# Altium PCB PCB1.PcbDoc
Units mil, origin at the board's own origin, x right, y up, seen from the top; angles counter-clockwise.
Board outline 1240.13 x 1035.43 mil, 4 copper layers (Top Layer, MidLayer1, MidLayer2, Bottom Layer); 68 components, 57 nets, 297 pads, 95 vias.
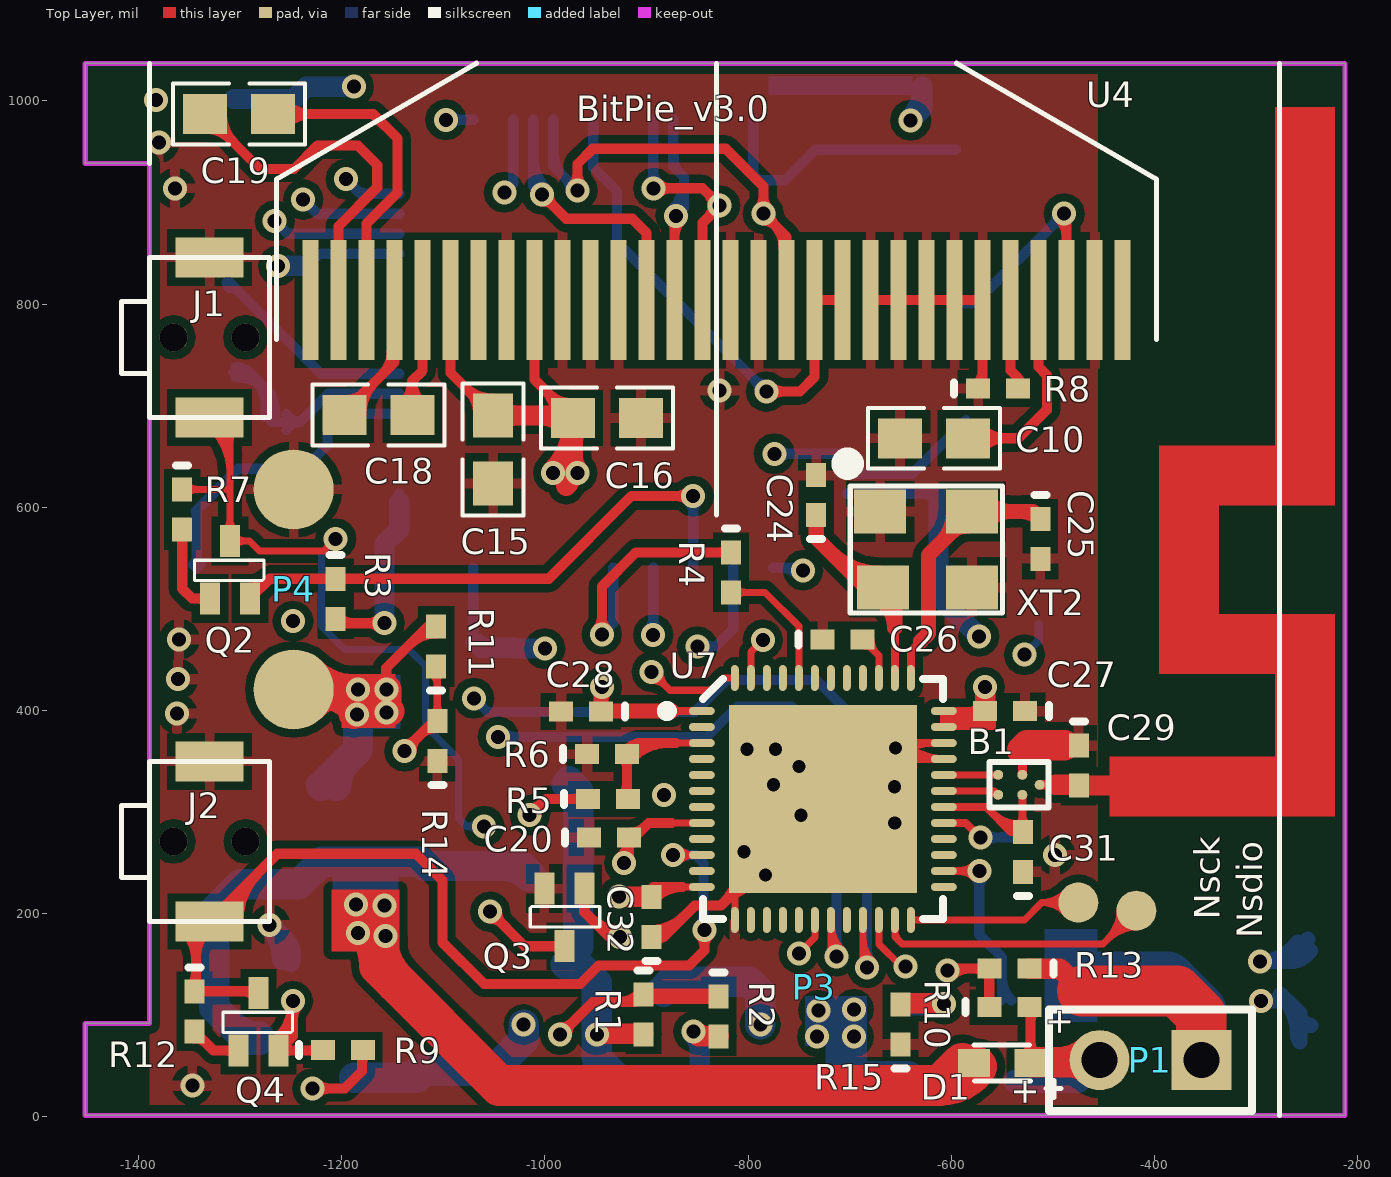
[diagram p0: Top Layer view]
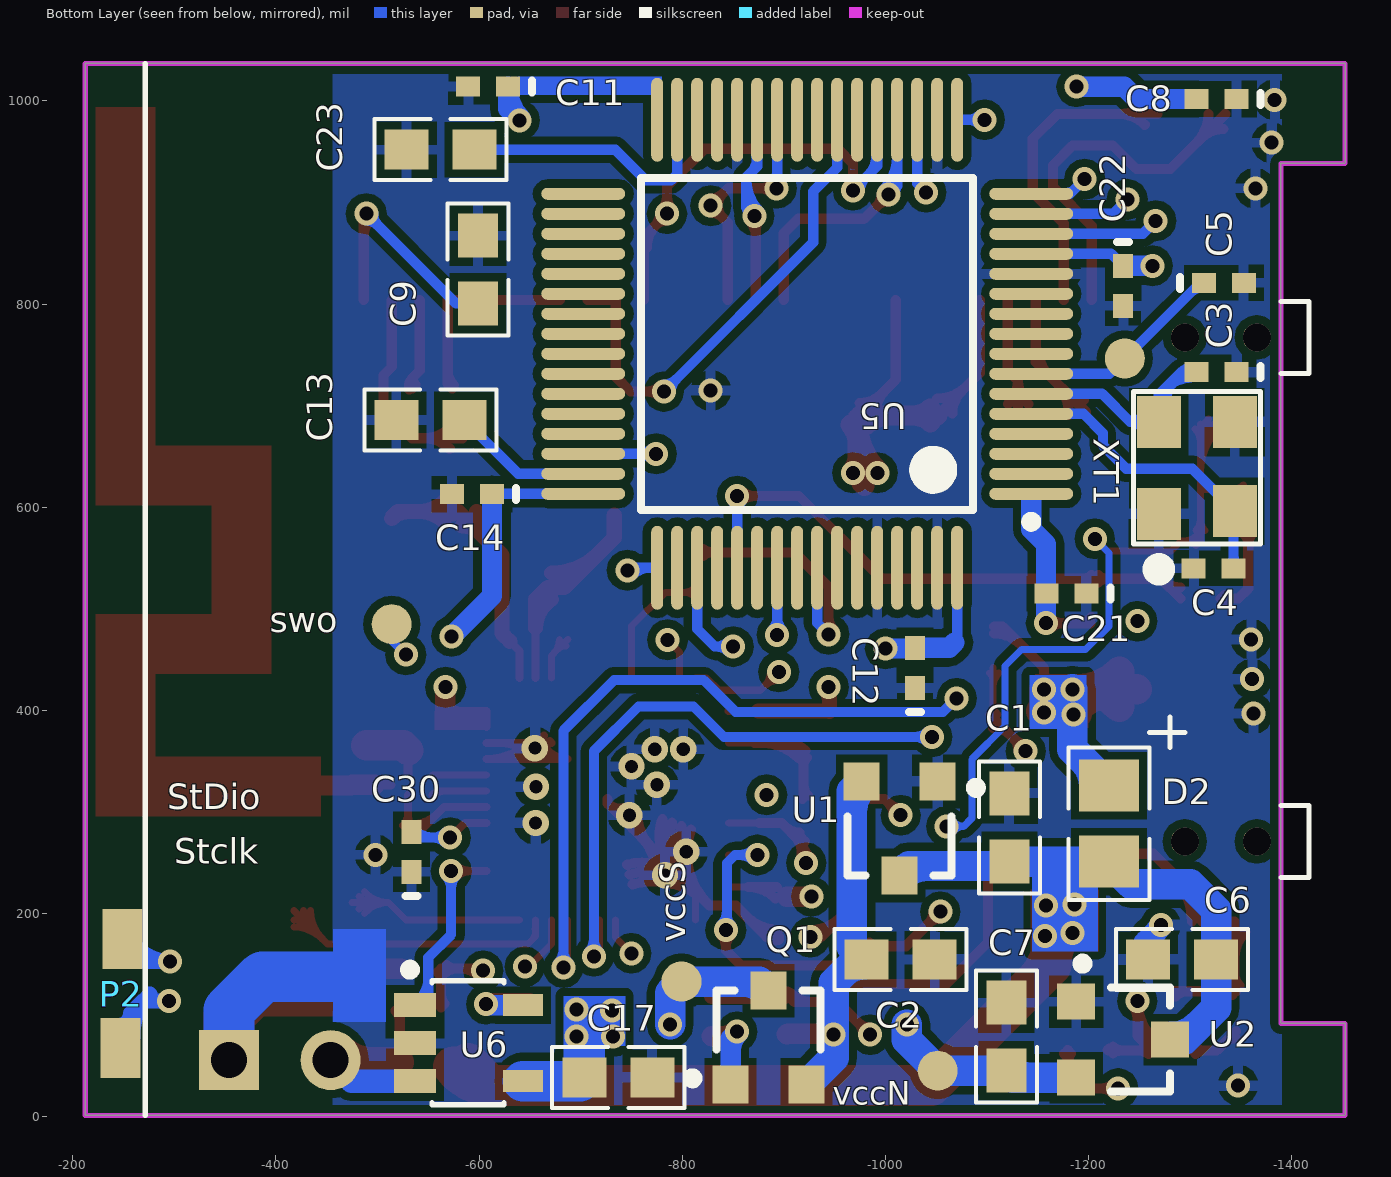
[diagram p1: Bottom Layer view, seen from below]
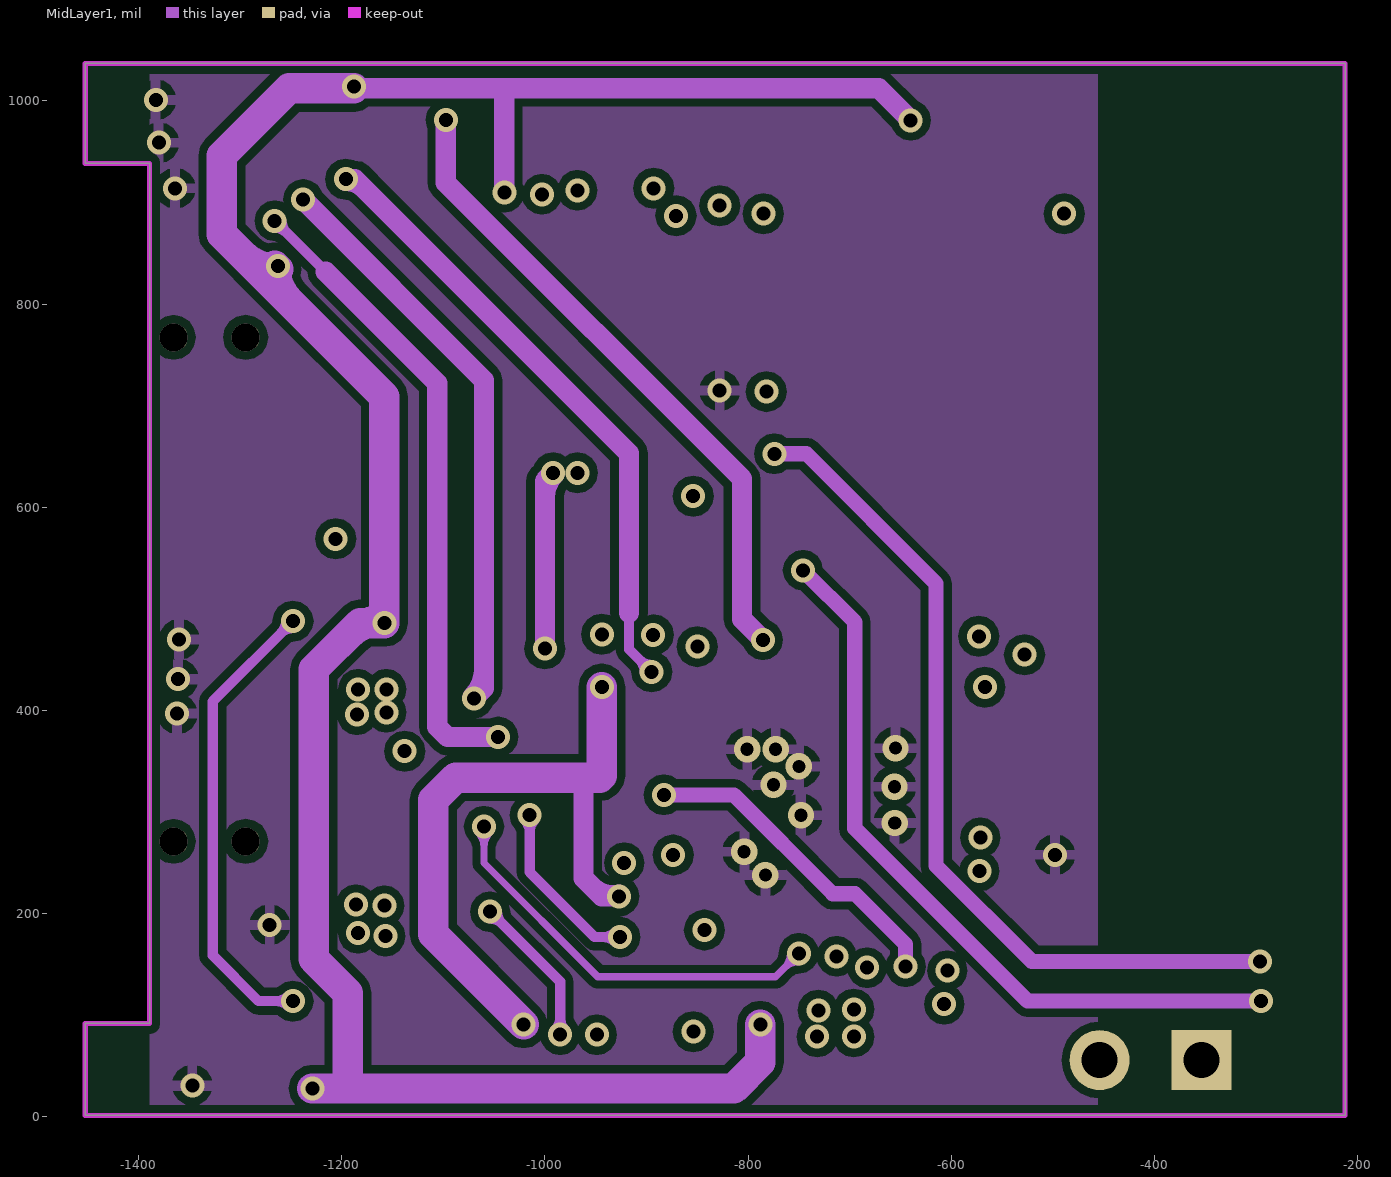
[diagram p2: MidLayer1]
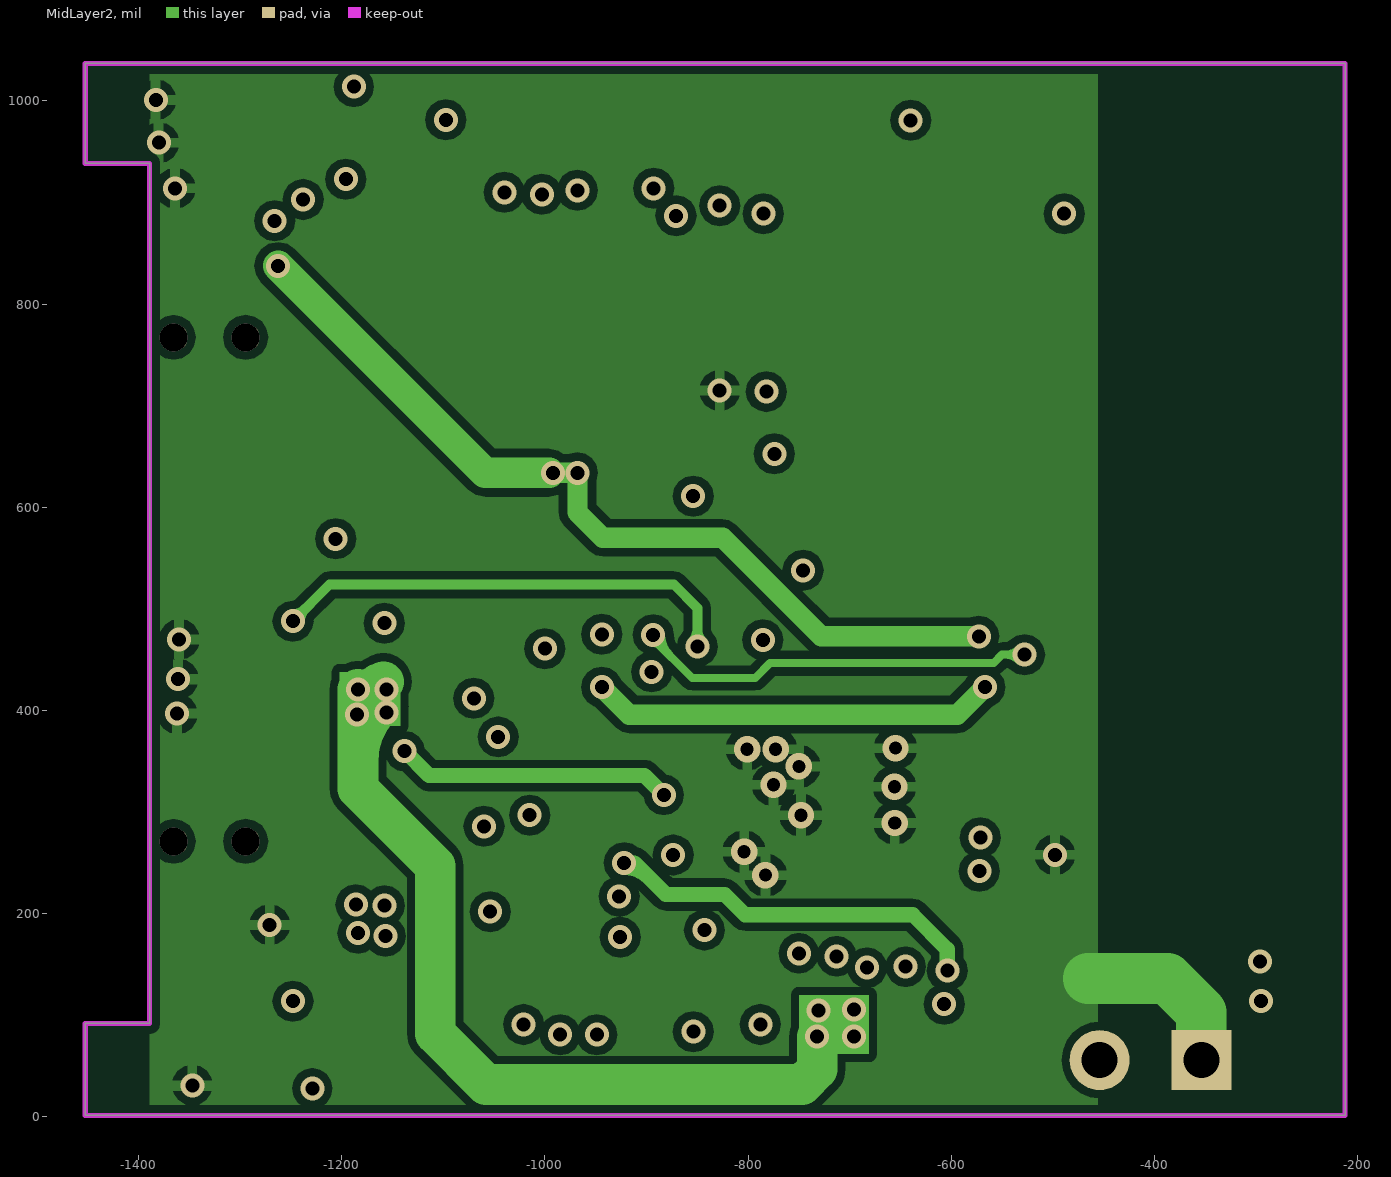
[diagram p3: MidLayer2]

## Layer stack, top to bottom
Top Layer: signal copper 1.4
Dielectric: core 12.6, FR-4, Dk 4.8
MidLayer1: signal copper 1.4
Dielectric: prepreg 12.6, FR-4, Dk 4.8
MidLayer2: signal copper 1.4
Dielectric: core 12.6, FR-4, Dk 4.8
Bottom Layer: signal copper 1.4

## Board outline
-1452.49,1036.95 -212.36,1036.95 -212.36,1.51 -1452.49,1.51 -1452.49,92.06 -1389.11,92.06 -1389.11,938.52 -1452.49,938.52 -1452.49,1036.95

## Design rules (kind name [scope] priority, off if disabled: settings)
Clearance [All] p1: gap=7
ComponentClearance [All] p1 off: gap=10 collisioncheckmode=3 verticalgap=10 showdistances=FALSE
Height [All] p1 off: minheight=0 maxheight=1000 prefheight=500
HoleSize [All] p1: absolutevalues=TRUE maxlimit=100 minlimit=0 maxpercent=80.000 minpercent=20.000
HoleToHoleClearance [All] p1 off: gap=10 allowstackedmicrovias=TRUE
LayerPairs [All] p1 off: enforce=TRUE
MinimumSolderMaskSliver [All] p1 off: minsoldermaskwidth=10
NetAntennae [All] p1 off: netantennaetolerance=0
PolygonConnect [All] p1: connectstyle=Relief reliefconductorwidth=10 reliefentries=4 polygonreliefangle="90 Angle"
RoutingVias [All] p1: holewidth=28 width=50 viastyle="Through Hole" minholewidth=1 minwidth=1 maxholewidth=280 maxwidth=500
SilkToSilkClearance [All] p1 off: silktosilkclearance=10
SilkscreenOverComponentPads [All] p1 off: minsilkscreentomaskgap=10
SolderMaskExpansion [All] p1: expansion=4
TestPointUsage [All] p1 off: valid=0 allowmultiple=FALSE
Testpoint [All] p1 off: side=15 testpointundercomponent=TRUE minsize=40 maxsize=100 preferedsize=60 minholesize=0 maxholesize=40 preferedholesize=32 testpointgrid=1 style=1023 order=0-112345678
Width [All] p1: maxlimit=100 minlimit=1 preferedwidth=10
15 further rules are at their usual default settings.

## Components (designator, comment, footprint, x,y, rotation, side; value= is the part's Value field where it differs from the comment)
B1 "BAL-NRF01D3" BAL-NRF01D3 -533.49,326.95 r0 top
C1 "1uF" 0603-1 -1122,285 r90 bottom
C2 "1uF" 0603-1 -1015,155 r180 bottom
C3 "22pF" 0402-A -1326,733 r0 bottom
C4 "22pF" 0402-a -1323,540 r180 bottom
C5 "1uF" 0402-a -1333,821 r180 bottom
C6 "1uF" 0603-1 -1292,155 r0 bottom
C7 "1uF" 0603-1 -1119,79 r90 bottom
C8 "0.1u" 0402-A -1326,1002 r0 bottom
C9 "2.2uF" 0603-1 -599,834 r90 bottom
C10 "4.7uF" 0603-1 -617,668 r180 top
C11 "0.1uf" 0402-A -609,1014 r0 bottom
C12 "0.1uf" 0402-A -1029,442 r90 bottom
C13 "2.2uF" 0603-1 -552,686 r0 bottom
C14 "0.1uf" 0402-A -593,613 r0 bottom
C15 "1uF" 0603-1 -1051,657 r270 top
C16 "1uF" 0603-1 -939,688 r0 top
C17 "4.7uF" 0603-1 -737,39 r0 bottom
C18 "1uF" 0603-1 -1164,691 r0 top
C19 "1uF" 0603-1 -1301,987 r0 top
C20 "2uf" 0402-A -937,275 r0 top
C21 "0.1uf" 0402-A -1178,515 r0 bottom
C22 "0.1uf" 0402-A -1234,818 r270 bottom
C23 "2.2uF" 0603-1 -562,952 r0 bottom
C24 "12Pf" 0402-a -733,612 r90 top
C25 "12Pf" 0402-a -512.49,568.95 r270 top
C26 "0.1uf" 0402-A -707,470 r0 top
C27 "1nf" 0402-a -547,399.56 r180 top
C28 "0.1uf" 0402-A -964.49,398.95 r180 top
C29 "0.8pf/NC" 0402-A -474.49,345.95 r270 top
C30 "47nf" 0402-A -533.49,260.95 r90 bottom
C31 "2.2nf" 0402-A -529.49,260.95 r90 top
C32 "0.1uf" 0402-A -895,197 r90 top
D1 "RB520S" sod523 -522,53 r180 top
D2 "4148" 0805-1 -1220,326 r270 bottom
J1 "ON/OFF" BUTTON -1330.06,846 r270 top
J2 "ON/OFF" BUTTON -1330.06,349.94 r270 top
P1 "Header 2" HDR1X2 -354,56 r180 top
P2 "DownLoad_stm32" swd6 -252,193 r270 bottom
P3 "DownLoad_Nodic" HDR1X4 -232,-506 r90 top
P4 "Header 2" PIN2_CHARGE -1247.34,617.65 r0 top
Q1 "1121" SOT-23 -885,78 r180 bottom
Q2 "3906" SOT523 -1310,563 r0 top
Q3 "3904" SOT523 -981,172 r180 top
Q4 "3906" SOT523 -1282,118 r0 top
R1 "1M" 0402-A -903,101 r270 top
R2 "1K" 0402-A -829,99 r270 top
R3 "1M" 0402-A -1206,510 r270 top
R4 "0R" 0402-A -817,536 r270 top
R5 "100K" 0402-A -938,313 r0 top
R6 "1M" 0402-A -939,357 r0 top
R7 "10K" 0402-A -1357,598 r270 top
R8 "390K" 0402-A -554,717 r0 top
R9 "1M" 0402-A -1199,66 r0 top
R10 "3M" 0402-A -543,108 r0 top
R11 "100K" 0402-A -1107,463 r90 top
R12 "10K" 0402-A -1345,104 r270 top
R13 "1M" 0402-A -543,146 r180 top
R14 "200K" 0402-A -1106,370 r90 top
R15 "20K" 0402-A -650,91 r90 top
U1 "MCP170" SOT-23 -1014,284 r0 bottom
U2 "170" SOT-23 -1234,76 r270 bottom
U4 "Oled12864" oled12864 -831.04,803.95 r0 top
U5 "stm32f205ret" LQFP-64 -923,761 r0 bottom
U6 "Tp4054" SOT-23_5-001 -537,110 r270 bottom
U7 "nRF51822-QFAA" QFN40P600X600X90-48N -726.49,312.95 r0 top
XT1 "8Mhz" SMD3225 -1269,684 r270 bottom
XT2 "16Mh" SMD3225 -579.49,595.95 r180 top

## Footprints (in the part's own frame and the unit in brackets; to place one, negate y for a bottom-side part, rotate by r counter-clockwise, add the part's x,y. Pads: shape width x height; smd on the part's side, far side on the other; paste and mask are expansions set on the pad)
0402-A [mm] "Chip Inductor; Body 1 x 0.5 mm (LxW typ)"
  rect 0.6x0.5 smd: 1(-0.5,0) 2(0.5,0)
  silkscreen extent -1.1,-0.15 -1.1,0.15
0402-a [mm] "Chip Inductor; Body 1 x 0.5 mm (LxW typ)"
  rect 0.6x0.5 smd: 1(-0.5,0) 2(0.5,0)
  silkscreen extent -1.1,-0.15 -1.1,0.15
0603-1 [mm] "贴片带丝印"
  rect 1.1x1 smd: 1(-0.85,0) 2(0.85,0)
  silkscreen extent -1.65,-0.76 1.65,0.76, body extent -1.14,-0.38 1.14,0.38, height 1
0805-1 [mm]
  rect 1.3x1.5 smd: 1(0,0) 2(1.9,0)
  silkscreen extent -1.72,-1.02 2.85,1.91
BAL-NRF01D3 [mm] "ST BAL-NRF01D3"
  round 0.25 smd: 1(-0.519,-0.25) 2(-0.519,0.25) 3(0.085,-0.25) 4(0.085,0.25) 5(0.518,0)
  silkscreen extent -0.74,-0.57 0.74,0.57
BUTTON [mm]
  rect 1x1.7 smd: 1(0,0) 2(4,0)
  round 0.7 hole 0.7: 3(2,-0.9) 3(2,0.9)
  silkscreen extent 0,-1.5 4,1.5
HDR1X2 [mm] "Connector; Header; 2 Position"
  rect 1.5x1.5 hole 0.9: 1(0,0)
  round 1.5 hole 0.9: 2(2.54,0)
  silkscreen extent -1.27,-1.27 3.81,1.27
HDR1X4 [mm] "Connector; Header; 4 Position"
  round 1 smd far side: 2(14.009,20.814)
  round 1 smd: 3(18.009,4.724) 4(18.212,6.172)
LQFP-64 [mm] "LQFP64"
  oval 2.1x0.3 smd: 1(-5.6,3.75) 2(-5.6,3.25) 3(-5.6,2.75) 4(-5.6,2.25) 5(-5.6,1.75) 6(-5.6,1.25) 7(-5.6,0.75) 8(-5.6,0.25) 9(-5.6,-0.25) 10(-5.6,-0.75) 11(-5.6,-1.25) 12(-5.6,-1.75) 13(-5.6,-2.25) 14(-5.6,-2.75) 15(-5.6,-3.25) 16(-5.6,-3.75) 33(5.6,-3.75) 34(5.6,-3.25) 35(5.6,-2.75) 36(5.6,-2.25) 37(5.6,-1.75) 38(5.6,-1.25) 39(5.6,-0.75) 40(5.6,-0.25) 41(5.6,0.25) 42(5.6,0.75) 43(5.6,1.25) 44(5.6,1.75) 45(5.6,2.25) 46(5.6,2.75) 47(5.6,3.25) 48(5.6,3.75)
  oval 0.3x2.1 smd: 17(-3.75,-5.6) 18(-3.25,-5.6) 19(-2.75,-5.6) 20(-2.25,-5.6) 21(-1.75,-5.6) 22(-1.25,-5.6) 23(-0.75,-5.6) 24(-0.25,-5.6) 25(0.25,-5.6) 26(0.75,-5.6) 27(1.25,-5.6) 28(1.75,-5.6) 29(2.25,-5.6) 30(2.75,-5.6) 31(3.25,-5.6) 32(3.75,-5.6) 49(3.75,5.6) 50(3.25,5.6) 51(2.75,5.6) 52(2.25,5.6) 53(1.75,5.6) 54(1.25,5.6) 55(0.75,5.6) 56(0.25,5.6) 57(-0.25,5.6) 58(-0.75,5.6) 59(-1.25,5.6) 60(-1.75,5.6) 61(-2.25,5.6) 62(-2.75,5.6) 63(-3.25,5.6) 64(-3.75,5.6)
  silkscreen extent -5.72,-4.15 4.15,4.57, body extent -5,-5 5,5, height 1.6
oled12864 [mm]
  rect 0.4x3 smd: 1(-10.15,0) 2(-9.45,0) 3(-8.75,0) 4(-8.05,0) 5(-7.35,0) 6(-6.65,0) 7(-5.95,0) 8(-5.25,0) 9(-4.55,0) 10(-3.85,0) 11(-3.15,0) 12(-2.45,0) 13(-1.75,0) 14(-1.05,0) 15(-0.35,0) 16(0.35,0) 17(1.05,0) 18(1.75,0) 19(2.45,0) 20(3.15,0) 21(3.85,0) 22(4.55,0) 23(5.25,0) 24(5.95,0) 25(6.65,0) 26(7.35,0) 27(8.05,0) 28(8.75,0) 29(9.45,0) 30(10.15,0)
  silkscreen extent -11,-0.98 11,5.92
PIN2_CHARGE [mm]
  round 2 smd: 1(0,0) 2(0,-5)
QFN40P600X600X90-48N [mm] "QFN, 48-Leads, Body 6,0x6,0mm (max), Pitch 0,40mm, IPC Medium Density"
  oval 0.65x0.2 smd: 1(-3.025,2.2) 2(-3.025,1.8) 3(-3.025,1.4) 4(-3.025,1) 5(-3.025,0.6) 6(-3.025,0.2) 7(-3.025,-0.2) 8(-3.025,-0.6) 9(-3.025,-1) 10(-3.025,-1.4) 11(-3.025,-1.8) 12(-3.025,-2.2) 25(3.025,-2.2) 26(3.025,-1.8) 27(3.025,-1.4) 28(3.025,-1) 29(3.025,-0.6) 30(3.025,-0.2) 31(3.025,0.2) 32(3.025,0.6) 33(3.025,1) 34(3.025,1.4) 35(3.025,1.8) 36(3.025,2.2)
  oval 0.2x0.65 smd: 13(-2.2,-3.025) 14(-1.8,-3.025) 15(-1.4,-3.025) 16(-1,-3.025) 17(-0.6,-3.025) 18(-0.2,-3.025) 19(0.2,-3.025) 20(0.6,-3.025) 21(1,-3.025) 22(1.4,-3.025) 23(1.8,-3.025) 24(2.2,-3.025) 37(2.2,3.025) 38(1.8,3.025) 39(1.4,3.025) 40(1,3.025) 41(0.6,3.025) 42(0.2,3.025) 43(-0.2,3.025) 44(-0.6,3.025) 45(-1,3.025) 46(-1.4,3.025) 47(-1.8,3.025) 48(-2.2,3.025)
  rect 4.7x4.7 smd: 49(0,0)
  silkscreen extent -4.02,-3 3,3, body extent -3,-3 3,3, height 0.9
SMD3225 [mm]
  rect 1.3x1.1 smd: 1(0,0) 2(2.3,0) 3(2.23,1.9) 4(0,1.9)
  silkscreen extent -0.76,-0.64 3.81,2.54
sod523 [mm]
  rect 0.8x0.7 smd: 1(0,0) 2(1.42,0)
  silkscreen extent -0.76,-0.45 1.42,0.86
SOT523 [mm]
  rect 0.5x0.8 smd: 1(-0.5,-1.34) 2(0.5,-1.34) 3(0,0.1)
  silkscreen extent -0.89,-0.89 0.85,-0.38
SOT-23 [mm]
  rect 0.9x0.95 smd: 1(-0.95,-1.175) 2(0.95,-1.175) 3(0,1.175)
  silkscreen extent -2.03,-1.14 1.3,1.18
SOT-23_5-001 [mm]
  rect 0.6x1.05 smd: 1(0,0) 2(0.95,0) 3(1.9,0)
  rect 0.55x1 smd: 4(1.9,2.7) 5(0,2.7)
  silkscreen extent -1.01,-0.25 2.49,2.22, body extent -0.49,0 2.41,2.8, height 1.09
swd6 [mm]
  rect 1.5x1 smd: 2(0.457,-0.076) 3(3.175,-0.127)

## Part data
B1: "ST BAL-NRF01D3"
C1 C2 C3 C4 C5 C6 C7 C9 C10 C13 C15 C16 C17 C18 C19 C23: library part CAP-0.1UF, "SMD-CAP"
C8 C11 C12 C14 C21 C22: "Capacitor, X7R, ?0%"
C20 C26 C28 C32: library part C0402-100n, "Capacitor, X7R, ?0%"
C24 C25: library part C0402-12p, "Capacitor, NP0, ?%"
C27: library part C0402-1n0, "Capacitor, X7R, ?0%"
C29: library part C0402-0.8p, "Capacitor, NP0, ?%"
C30: library part C0402-47n, "Capacitor, X7R, ?0%"
C31: library part C0402-2n2, "Capacitor, X7R, ?0%"
D1: library part Diode, "Default Diode"
D2: library part "Diode 1N4148", "High Conductance Fast Diode"
J1 J2: library part KEY
P1 P4: "Header, 2-Pin"
P2: library part "Header 6", "Header, 6-Pin"
P3: library part "Header 4", "Header, 4-Pin"
Q1: library part MOSFET-P, "P-Channel MOSFET"
Q2 Q4: library part 2N3906, "PNP General Purpose Amplifier"
Q3: library part 2N3904, "NPN General Purpose Amplifier"
R1 R2 R3 R4 R5 R6 R7 R8 R9 R10 R11 R12 R13 R14 R15: library part R-10K, "resistor"
U2: library part MCP170
U7: library part nRF51822-Q48-6x6_DCDC, "Multi-protocol Bluetooth Low Energy and 2.4GHz proprietary system-on-chip"
XT1 XT2: library part XT, "晶振"

## Free pads (board coordinates)
  round 39.37 smd far side: 2(-799.26,133.26) 4(-1235.55,746.55) 6(-514,485)

## Via types
v1: diameter 23.62, hole 13.78, Top Layer to Bottom Layer, 85 vias
v2: diameter 25.98, hole 12.99, Top Layer to Bottom Layer, 10 vias

## Nets (pads, with @x,y where several pads share a name; then routed paths per layer and width w, separated by ;. In a path a pad name is that pad's centre, name@x,y a point inside that pad or via, vN(x,y) a via of type N, cw(c..) or ccw(c..) an arc to the next point about the centre after c; other vN are vias at no path point)
ADC_VBAT: C20.2 R10.1 R13.2 U7.8 | length 715
  Top Layer w7: -875.68,289.32 U7.8
  Top Layer w10: v1@-926.43,255.17 ccw(c-943.43,275) C20.2 -917.31,252.69 -920,250 v1(-922,250) ; C20.2@-920.74,271.58 cw(c-929.01,263.31) -917.31,263.31 cw(c-905.62,263.31) C20.2@-913.89,271.58 ; C20.2@-915.35,279.84 ccw(c-915.35,298.85) -901.9,285.41 ; C20.2@-914.81,272.5 -897.99,289.32 -875.68,289.32 ; v1(-604,144) -602,146 R13.2 R10.1 ; v1@-599.18,139.18 cw(c-582.73,122.73) -582.73,146 ; R13.2@-568.08,142.58 ccw(c-576.34,134.31) -576.34,146 ccw(c-576.34,157.69) R13.2@-568.08,149.42 ; R10.1@-566.11,111.42 ccw(c-574.38,119.69) -562.68,119.69 ccw(c-550.99,119.69) R10.1@-559.26,111.42 ; R13.2@-566.11,142.58 cw(c-574.38,134.31) -562.68,134.31 cw(c-550.99,134.31) R13.2@-559.26,142.58
  MidLayer2 w15: v1@-922,245.69 cw(c-922,211.14) -897.57,235.57 ; v1(-922,250) -912,250 -881,219 -823,219 -803,199 -638,199 -604,165 v1(-604,144)
CHARGESTAUTS: U6.1 U7.26 | length 250.5
  Top Layer w8: U7.26 v1@-572.62,242.08 ; -591.67,242.08 cw(c-591.67,222.76) v1@-578.01,236.42 ; -591.02,242.08 ccw(c-591.02,260.48) v1@-578.01,247.47
  Bottom Layer w10: v1@-577.31,237.13 cw(c-588.93,225.5) -572.49,225.5 cw(c-556.05,225.5) v1@-567.67,237.13 ; v1(-572.49,241.95) -572.49,179.49 -550,157 U6.1@-550,115 ; -550,136.44 ccw(c-519.42,136.44) U6.1@-541.04,114.82
CTS: U5.14 U7.19 | length 1489.9
  Top Layer w7: -718.62,174.72 ccw(c-696.28,174.72) v1@-712.07,158.93 ; U7.19@-718.62,191.62 ccw(c-679.38,191.62) v1@-707.12,163.88 ; U7.19 -718.62,163.62 v1(-713,158)
  MidLayer1 w10: v1@-1266,875.19 cw(c-1266,858.75) -1254.37,870.37 cw(c-1242.75,882) v1@-1259.19,882 ; v1(-1266,882) -1215.79,831.79
  MidLayer1 w20: -1215.79,831.79 -1106,722 -1106,384 -1096,374 v1(-1046,374)
  Bottom Layer w10: v1(-1266,882) -1253.27,869.27 U5.14 ; v1@-1046,378.01 v1(-1046,374) -841,374 -811,404 -757,404 -713,360 v1(-713,158) ; v1@-1041.18,369.18 cw(c-1029.56,357.56) -1029.56,374 cw(c-1029.56,390.44) v1@-1041.18,378.82 ; v1@-717.82,162.82 ccw(c-729.44,174.44) -713,174.44 ccw(c-696.56,174.44) v1@-708.18,162.82
CTS_NODIC: U5.15 U7.21 | length 1467.7
  Top Layer w7: v1@-687.12,151.12 U7.21 ; -687.12,160.11 ccw(c-669.89,160.11) v1@-682.07,147.93 ; -687.12,177.01 ccw(c-652.99,177.01) v1@-677.12,152.88
  MidLayer1 w20: v1(-1238,903) -1060,725 -1060,422 v1(-1070,412) ; v1@-1071.28,413.28 ccw(c-1098.51,440.51) -1060,440.51
  Bottom Layer w10: v1(-1238,903) -1223.95,888.95 U5.15 ; v1(-1070,412) -1056.5,398.5 -852.5,398.5 -821,430 -733,430 -683,380 v1(-683,147) ; v1@-687.82,151.82 ccw(c-699.44,163.44) -683,163.44 ccw(c-666.56,163.44) v1@-678.18,151.82
GND: B1.4 C1.2 C2.2 C3.1 C4.1 C5.2 C6.2 C7.2 C8.1 C9.2 C10.2 C11.2 C12.1 C13.2 C14.2 C15.2 C16.2 C17.1 C20.1 C21.1 C22.2 C23.2 C24.2 C25.2 C26.1 C27.1 C28.2 C29.1 C30.1 C31.1 C32.1 J1.1 J2.1 P1.1 P4.1 Q3.2 R6.1 R8.1 R13.1 R14.1 R15.1 U1.1 U2.1 U4.8 U4.10 U4.11 U4.12 U4.16 U4.17 U4.21 U4.22 U4.23 U4.24 U4.25 U4.29 U5.12 U5.18 U5.28 U5.60 U5.63 U6.2 U7.13 U7.33 U7.34 U7.49 XT1.2 XT1.4 XT2.2 XT2.4 | length 2433.6
  Top Layer w7: U7.13 U7.49@-813.1,226.33
  Top Layer w8: U7.49@-674.06,352.32 ccw(c-674.06,372.72) U7.49@-655.88,363.45 ; U7.49@-671.37,368.06 U7.34 ; U7.49@-669.55,369.88 ccw(c-627.15,412.29) -627.15,352.32 ; U7.49@-665.61,352.39 ccw(c-665.44,352.56) U7.49@-665.44,352.32 ; U7.49@-663.01,367.08 cw(c-687.12,379.37) -687.12,352.32 U7.33 ; U7.49@-659.96,358.04 ccw(c-646.12,371.88) U7.49@-646.12,352.32 ; U7.49@-654.3,362.3 cw(c-640.38,348.38) U7.49@-640.38,368.06 ; U7.49@-654.3,363.7 ccw(c-626.81,391.19) -626.81,352.32 ; U7.49@-648.64,356.64 cw(c-621.07,329.07) -621.07,368.06 ; U7.49@-648.64,369.36 ccw(c-607.5,410.5) U7.33@-607.5,352.32 ; U7.49@-645.85,368.06 cw(c-645.85,393.58) -663.9,375.54 ccw(c-607.83,431.6) U7.33@-607.83,352.32
  Top Layer w9: B1.4 -530.13,360.87
  Top Layer w10: C32.1@-895,174.13 ccw(c-895,194.53) -880.57,180.1 ; C32.1 -882.68,177.32 -882.68,177.99 -852.67,208 -827,208 U7.49@-726.49,308.51 ; C32.1@-895,184.13 ccw(c-895,228.67) -863.5,197.17 ; C32.1@-891.58,173.89 cw(c-883.31,165.62) -883.31,177.32 cw(c-883.31,189.01) C32.1@-891.58,180.74 ; -820.54,214.46 cw(c-783,176.91) U7.49@-783,230.01 ; U7.49@-813.69,221.31 ccw(c-857.5,265.11) U7.49@-799.31,286.36 ; U7.49@-812.87,222.13 cw(c-766.77,176.03) U7.49@-748.37,238.58 ; U7.49@-808.7,282.93 cw(c-873.74,259.18) -824.78,210.22 cw(c-772.18,157.62) U7.49@-751.19,228.98 ; U7.49@-803.47,231.53 cw(c-783,211.06) U7.49@-783,240.01 ; U7.49@-802.61,232.39 ccw(c-841.25,271.04) U7.49@-789.91,289.79 ; U7.49@-800.96,234.04 cw(c-761.35,194.44) U7.49@-745.55,248.17 ; U7.49@-791.52,243.48 ccw(c-825.01,276.97) U7.49@-780.52,293.22 ; U7.49@-785.01,238 cw(c-756.06,238) U7.49@-776.53,258.47 ; U7.49@-775.01,238 cw(c-721.91,238) U7.49@-759.46,275.54 ; U7.49@-768.71,266.29 ccw(c-799.43,297) U7.49@-755.99,297 ; U7.49@-751.64,283.36 ccw(c-765.29,297) U7.49@-745.99,297 ; U7.49@-745.18,304.48 ccw(c-738.96,320.98) U7.49@-726.49,308.51 ; U7.49 U7.49@-726.49,308.51 ; U4.21 U4.22 U4.23 U4.24 U4.25 -569.23,721.46 R8.1 ; R8.1@-575.14,720.42 ccw(c-589.41,734.7) -569.23,734.7
  Top Layer w20: R13.1 -493,146 -471,124
  Top Layer w30: -530.13,360.87 -525.37,365.63 -489,365.63
  Top Layer w50: -471,124 -378,124 -354,100 P1.1
  MidLayer2 w50: -465.27,136.27 -387.27,136.27 -354,103 P1.1
  Bottom Layer w20: v1@-1272.28,187.72 cw(c-1305.46,154.54) C6.2@-1258.54,154.54 ; v1(-1271,189) -1258.54,176.54 C6.2 ; -1256.9,174.9 cw(c-1273.87,157.93) C6.2@-1250.43,152.79
  Bottom Layer w50: -473,138 -387,138 -354,105 P1.1
  other v1: -1347,31 -498,258 -1362,397 -1361,431 -1360,470 -828,715 -1364,914 -1380,959 -1383,1001
  other v2: -783,238 -804,261 -655.62,289.32 -748,297 -656,325 -775,327 -750,345 -801,362 -773,362 -655,363
KEY1: Q2.2 R3.1 U5.53 | length 657.3
  Top Layer w10: Q2.2 -1270.87,529.68 R3.1 -996.31,529.68 -914.9,611.1 v1(-854.1,611.1) ; Q2.2@-1290.31,520.99 ccw(c-1290.31,546.94) -1271.97,528.59 ; R3.1@-1209.42,526.26 ccw(c-1217.69,517.99) -1217.69,529.68 ccw(c-1217.69,541.38) R3.1@-1209.42,533.11 ; R3.1@-1202.58,526.26 cw(c-1194.31,517.99) -1194.31,529.68 cw(c-1194.31,541.38) R3.1@-1202.58,533.11 ; v1@-858.92,606.29 ccw(c-870.55,594.66) -870.55,611.1 ccw(c-870.55,627.55) v1@-858.92,615.92
  Bottom Layer w10: v1@-858.92,606.29 cw(c-870.55,594.66) -854.1,594.66 cw(c-837.66,594.66) v1@-849.29,606.29 ; U5.53 v1(-854.1,611.1)
KEY1_NODIC: J1.2 Q2.3 R7.1 U7.18 | length 1392.9
  Top Layer w7: R7.1 -1311.31,617.68 ; R7.1@-1352.52,613.2 cw(c-1341.69,602.37) -1341.69,617.69 cw(c-1341.69,633) R7.1@-1352.52,622.17 ; J1.2@-1327.72,677.08 cw(c-1370.5,634.3) -1310,634.3 ; J1.2@-1322.77,682.02 cw(c-1353.6,651.19) -1310,651.19 ; J1.2@-1317.82,686.97 cw(c-1336.7,668.09) -1310,668.09 ; Q2.3@-1314.48,577.33 ccw(c-1325.31,588.15) -1310,588.15 ccw(c-1294.69,588.15) Q2.3@-1305.52,577.33 ; -1310,664.6 cw(c-1292.35,664.6) J1.2@-1304.83,677.08 ; J1.2@-1310,682 Q2.3 -1290.94,566.94 -1281,557 -1218,557 v1(-1206,569) ; Q2.3@-1305.52,562.45 cw(c-1294.69,551.62) -1294.69,566.94 cw(c-1294.69,582.25) Q2.3@-1305.52,571.42 ; v1(-750,161) -734.36,176.64 U7.18
  MidLayer1 w7: v1@-1065.88,280.12 cw(c-1080.06,265.94) -1060,265.94 cw(c-1039.94,265.94) v1@-1054.12,280.12 ; v1(-1060,286) -1060,250 -948,138 -773,138 v1(-750,161) ; v1@-758.31,161 cw(c-778.38,161) -764.19,146.81 cw(c-750,132.62) v1@-750,152.69
  Bottom Layer w7: v1(-1206,569) -1220,555 -1220,483 -1197,460 -1134,460 -1117.73,443.73 -1117.73,384.73 -1085,352 -1085,294 -1077,286 ; v1@-1066.56,280.9 ccw(c-1077,272.77) -1077,286 ; v1@-1066.56,291.1 cw(c-1077,299.23) -1077,286 ; v1(-1060,286) -1077,286
KEY2: Q4.2 R9.1 U5.51 | length 1400.7
  Top Layer w10: Q4.2@-1265.54,74.76 ccw(c-1300.65,114) v1(-1248,114) -1248,79.56 ; Q4.2@-1261.18,75.86 ccw(c-1257.89,89.44) -1248,79.56 ; Q4.2@-1258.89,61.82 cw(c-1250.62,53.55) -1250.62,65.24 cw(c-1250.62,76.93) Q4.2@-1258.89,68.67 ; Q4.2@-1258.88,67.31 ccw(c-1280.64,91.63) -1248,91.63 ; v1@-1252.82,109.18 cw(c-1264.44,97.56) -1248,97.56 cw(c-1231.56,97.56) v1@-1243.18,109.18 ; -1234.17,65.24 ccw(c-1234.17,79.52) R9.1@-1224.08,69.42 ; -1230.52,65.24 cw(c-1230.52,56.13) R9.1@-1224.08,62.58 ; R9.1@-1220,67.32 R9.1 -1219.44,65.24 Q4.2 -1260.16,67.4 -1248,79.56
  MidLayer1 w10: v1@-1254.81,488 cw(c-1271.25,488) -1259.63,476.37 cw(c-1248,464.75) v1@-1248,481.19 ; v1@-1252.82,109.18 ccw(c-1264.44,97.56) -1264.44,114 ccw(c-1264.44,130.44) v1@-1252.82,118.82 ; v1(-1248,114) -1282,114 -1327,159 -1327,409 v1(-1248,488)
  MidLayer2 w10: v1(-1248,488) -1212,524 -873,524 -850,501 v1(-850,463) ; v1@-1248,494.81 ccw(c-1248,511.25) -1236.37,499.63 ccw(c-1224.75,488) v1@-1241.19,488 ; v1@-854.82,467.82 ccw(c-866.44,479.44) -850,479.44 ccw(c-833.56,479.44) v1@-845.18,467.82
  Bottom Layer w10: v1(-850,463) -832,463 -814.73,480.27 U5.51 ; v1@-845.18,458.18 cw(c-833.56,446.56) -833.56,463 cw(c-833.56,479.44) v1@-845.18,467.82
KEY2_NODIC: J2.2 Q4.3 R12.1 U7.10 | length 1206.9
  Top Layer w7: v1(-873.83,257.83) U7.10 ; v1@-867.95,251.95 cw(c-853.76,237.76) -853.76,257.83 cw(c-853.76,277.89) v1@-867.95,263.7
  Top Layer w10: J2.2@-1354.22,182.07 cw(c-1380.2,156.09) -1343.46,156.09 ; R12.1@-1348.42,129.08 ccw(c-1360.42,141.07) -1343.46,141.07 ; R12.1 -1283.75,123.68 Q4.3 ; R12.1@-1343.46,125.23 -1343.46,192.46 J2.2 -1263.51,259 -1127,259 -1101,233 -1101,172 -1060,131 -965,131 -947,149 -858,149 -843,164 v1(-843,184) ; -1343.46,157.92 cw(c-1309.29,157.92) J2.2@-1333.45,182.07 ; R12.1@-1341.58,120.26 cw(c-1333.31,111.99) -1333.31,123.68 cw(c-1333.31,135.38) R12.1@-1341.58,127.11 ; J2.2@-1311.59,192.46 cw(c-1267.01,192.46) -1298.53,223.98 ; J2.2@-1301.59,192.46 cw(c-1232.87,192.46) -1281.46,241.05 ; -1297.91,123.68 cw(c-1297.91,106.03) Q4.3@-1285.42,118.51 ; v1@-847.82,179.18 cw(c-859.44,167.56) -843,167.56 cw(c-826.56,167.56) v1@-838.18,179.18
  Bottom Layer w10: v1(-873.83,257.83) -851.83,257.83 -844,250 v1@-844,185 ; v1@-869.01,253.01 cw(c-857.38,241.38) -857.38,257.83 cw(c-857.38,274.27) v1@-869.01,262.64 ; v1@-847.82,188.82 ccw(c-857.03,198.03) -844,198.03 ; -844,202.86 ccw(c-824.14,202.86) v1@-838.18,188.82
NetB1_1: B1.1 U7.31 | length 67.7
  Top Layer w7: U7.31 -557.62,320.82 B1.1 ; -566.31,320.82 cw(c-566.31,304.7) B1.1@-554.91,316.1
NetB1_2: B1.2 U7.32 | length 53.3
  Top Layer w7: U7.32 B1.2@-554.13,336.57
NetB1_3: B1.3 C31.2 U7.30 | length 213.2
  Top Layer w8: U7.30 -565.62,305.07 -541.17,280.63 ; -558.79,298.24 ccw(c-534.4,322.63) C31.2@-530.2,288.4 ; -547.19,286.64 ccw(c-531.86,301.97) C31.2@-529.23,280.46 ; C31.2@-534.16,277.12 ccw(c-541.17,271.87) -541.17,280.63 ; C31.2@-534.16,284.14 cw(c-541.17,289.39) -541.17,280.63 ; C31.2@-533.62,286.73 ccw(c-542.05,295.16) -530.13,295.16 ; C31.2@-530.13,281.27 B1.3 ; -530.13,298.24 ccw(c-513.84,298.24) C31.2@-525.36,286.73 ; C31.2 -541.17,280.63
NetB1_5: B1.5 C29.2 | length 96.6
  Top Layer w9: B1.5 -497.49,326.95
  Top Layer w20: -497.49,326.95 -475.17,326.95 C29.2 -416.8,326.26
NetC1_1: C1.1 C6.1 D1.2 D2.2 U1.3 U2.3 | length 1435.6
  Top Layer w30: D1.2@-589,53 D1.2
  Top Layer w40: v1@-1180.19,188.25 cw(c-1195.16,159.79) -1163,159.79 ; v1@-1178.21,186.79 cw(c-1214.93,150.07) -1163,150.07 ; v1@-1165.19,178 ccw(c-1100.46,178) -1146.23,132.23 ; v1@-1163,178 -1163,149 -1045.01,31.01 -610.99,31.01 ; -617.94,31.01 ccw(c-617.94,91.07) D1.2@-575.48,48.6 ; D1.2@-589,53 -610.99,31.01 ; D1.2@-574.86,49.32 cw(c-610.99,75.81) -610.99,31.01
  Bottom Layer w30: -1307.66,89.66 ccw(c-1281.24,116.07) U2.3@-1281.24,78.72 ; U2.3 -1294,76 -1325.46,107.46 -1325.46,203.54 -1300,229 -1242.2,229 D2.2 -1122.34,251.2 -1118.14,247 -1023.26,247 U1.3 ; -1040.54,247 cw(c-1040.54,212.19) U1.3@-1015.92,236.8
  other v1: -1157,178 -1184,181 -1158,208 -1186,209
NetC9_1: C9.1 U4.28 | length 278
  Top Layer w10: v1@-493.82,884.18 cw(c-511.36,866.64) -486.55,866.64 ; v1(-489,889) -486.55,886.55 U4.28
  Bottom Layer w10: C9.1 -577.46,800.54 v1(-489,889) ; v1@-495.81,889 cw(c-512.25,889) -500.63,877.37 cw(c-489,865.75) v1@-489,882.19
NetC10_1: C10.1 U4.27 | length 256.1
  Top Layer w10: C10.1 -534,668 -506,696 -506,730 -514.11,738.11 U4.27 ; C10.1@-571.18,657.62 cw(c-546.11,632.55) -546.11,668 cw(c-546.11,703.45) C10.1@-571.18,678.38
NetC13_1: C13.1 U5.47 | length 139
  Bottom Layer w10: U5.47 -638.42,633.05 C13.1
NetC18_1: C18.1 U4.4 | length 213
  Top Layer w10: C18.1 -1197.46,693.54 -1147.97,743.03 U4.4 ; C18.1@-1195.5,705.69 ccw(c-1195.5,730.26) -1178.12,712.88 ; C18.1@-1180.81,691 cw(c-1134.48,691) -1167.24,723.76 ; -1159.76,731.24 ccw(c-1181.28,752.76) U4.4@-1150.84,752.76
NetC18_2: C18.2 U4.5 | length 168.1
  Top Layer w10: C18.2@-1140.48,701.81 ccw(c-1161.32,724.46) -1130.54,724.46 ; C18.2 -1130.54,724.46 ; C18.2@-1120.59,701.81 cw(c-1099.75,724.46) -1130.54,724.46 ; U4.5 -1120.41,734.59 -1130.54,724.46
NetC19_1: C19.1 U4.2 | length 413.7
  Top Layer w10: C19.1 -1280.46,933 -1247,933 -1224,956 -1184,956 -1165,937 -1165,915 -1203.09,876.91 U4.2 ; C19.1@-1332.5,972.32 cw(c-1332.5,941.61) -1310.79,963.32 ; C19.1@-1317.81,987 ccw(c-1277.61,987) -1306.04,958.57
NetC19_2: C19.2 U4.3 | length 359.9
  Top Layer w10: C19.2 -1169,987 -1145,963 -1145,910 -1175.53,879.47 U4.3 ; C19.2@-1255.18,976.62 cw(c-1230.11,951.55) -1230.11,987 cw(c-1230.11,1022.45) C19.2@-1255.18,997.38
NetC23_1: C23.1 U5.31 | length 267.9
  Bottom Layer w10: U5.31 -795.05,928.05 -789,922 -764,922 -734,952 C23.1
NetC24_1: C24.1 U7.38 XT2.3 | length 313.8
  Top Layer w8: U7.38 -655.62,482
  Top Layer w10: XT2.3@-670.17,518.26 XT2.3
  Top Layer w15: C24.1 -733,570 -684.14,521.14 XT2.3 -655.62,509.48 -655.62,482 ; -717.44,554.44 ccw(c-671.22,600.66) XT2.3@-671.22,535.3 ; XT2.3@-691.83,528.83 ccw(c-671.22,549.44) XT2.3@-671.22,520.3 ; XT2.3@-670.96,509.21 cw(c-688.78,481.25) -655.62,481.25
NetC25_1: C25.1 U7.37 XT2.1 | length 391.7
  Top Layer w8: U7.37 -639.88,458.56 -630.22,468.22
  Top Layer w10: XT2.1 XT2.1@-574.82,591.28 ; C25.1@-515.14,591.28 C25.1
  Top Layer w15: -630.22,468.22 -622.49,475.95 -622.49,552.95 XT2.1 -519.8,595.95 C25.1@-515.14,591.28 ; -610.37,565.06 ccw(c-641.25,595.95) XT2.1@-597.58,595.95 ; XT2.1@-600.87,574.57 cw(c-583.43,557.13) XT2.1@-583.43,581.79 ; XT2.1@-565.54,585.94 cw(c-541.38,561.78) -541.38,595.95 cw(c-541.38,630.11) XT2.1@-565.54,605.95 ; -531.05,595.95 cw(c-531.05,572.04) C25.1@-514.15,588.94
NetC26_2: C26.2 U7.39 | length 68.6
  Top Layer w7: C26.2 -671.37,454.06 U7.39 ; C26.2@-685.35,463.66 cw(c-685.35,453.1) C26.2@-677.88,460.56 ; C26.2@-679,470 ccw(c-658.94,470) -673.13,455.81
NetC30_2: C30.2 U7.29 | length 127.2
  Top Layer w8: U7.29 -585.87,289.32 v1(-571.49,274.95)
  Bottom Layer w8: C30.2@-539.17,274.95 C30.2
  Bottom Layer w10: v1(-571.49,274.95) C30.2@-539.17,274.95 ; v1@-566.67,270.13 cw(c-555.05,258.5) -555.05,274.95 cw(c-555.05,291.39) v1@-566.67,279.76 ; -554.15,274.95 ccw(c-554.15,299.33) C30.2@-536.91,282.09
NetQ1_1: Q1.1 R2.2 | length 147.7
  Top Layer w20: v1(-854,84) -849.31,79.31 R2.2 ; v1@-852.72,85.28 ccw(c-838.32,99.68) R2.2@-838.32,79.31
  Bottom Layer w20: v1@-855.28,82.72 cw(c-873.83,64.17) -847.6,64.17 ; v1(-854,84) -847.6,77.6 Q1.1 ; Q1.1@-853.05,38.18 ccw(c-866.23,51.35) -847.6,51.35 ccw(c-828.97,51.35) Q1.1@-842.14,38.18
NetQ2_1: Q2.1 R7.2 | length 126.4
  Top Layer w10: R7.2@-1360.42,572.92 cw(c-1368.69,564.66) -1357,564.66 cw(c-1345.31,564.66) R7.2@-1353.58,572.92 ; R7.2 -1357,520 -1347.24,510.24 Q2.1 ; Q2.1@-1333.11,506.82 ccw(c-1341.38,498.55) -1341.38,510.24 ccw(c-1341.38,521.93) Q2.1@-1333.11,513.67
NetQ3_1: Q3.1 R5.1 | length 464.1
  Top Layer w10: v1(-1015,297) -999,313 R5.1 ; v1@-1015,303.81 ccw(c-1015,320.25) -1003.37,308.63 ccw(c-991.75,297) v1@-1008.19,297 ; Q3.1@-964.74,215.43 cw(c-973.01,207.16) -961.31,207.16 cw(c-949.62,207.16) Q3.1@-957.89,215.43 ; R5.1@-963.08,309.58 ccw(c-971.34,301.31) -971.34,313 ccw(c-971.34,324.69) R5.1@-963.08,316.42 ; Q3.1 -961.31,202 -936.31,177 v1(-926,177) ; -955.24,195.92 ccw(c-926,225.16) v1@-926,183.81 ; -938.16,178.85 ccw(c-926,191.01) v1@-926,173.81
  MidLayer1 w10: v1@-1019.82,292.18 cw(c-1031.44,280.56) -1015,280.56 cw(c-998.56,280.56) v1@-1010.18,292.18 ; v1(-1015,297) -1015,241 -951,177 v1(-926,177) ; v1@-930.82,172.18 ccw(c-942.44,160.56) -942.44,177 ccw(c-942.44,193.44) v1@-930.82,181.82
NetQ3_3: Q3.3 R1.1 R2.1 | length 556.1
  Top Layer w10: v1@-1054,195.19 cw(c-1054,178.75) -1042.37,190.37 cw(c-1030.75,202) v1@-1047.19,202 ; v1(-1054,202) -1020.06,168.06 Q3.3 ; v1(-985,81) -953,113 -910.68,113 R1.1 ; v1@-985,87.81 ccw(c-985,104.25) -973.37,92.63 ccw(c-961.75,81) v1@-978.19,81 ; Q3.3@-984.42,164.64 ccw(c-992.69,156.37) -992.69,168.06 ccw(c-992.69,179.75) Q3.3@-984.42,171.49 ; -928.49,113 ccw(c-928.49,144.21) R1.1@-906.42,122.14
  Top Layer w15: R1.1 -901,118.68 R2.1
  MidLayer1 w10: v1@-1054,195.19 cw(c-1054,178.75) -1042.37,190.37 cw(c-1030.75,202) v1@-1047.19,202 ; v1(-1054,202) -985,133 v1(-985,81) ; v1@-989.82,85.82 ccw(c-1001.44,97.44) -985,97.44 ccw(c-968.56,97.44) v1@-980.18,85.82
NetQ4_1: Q4.1 R12.2 | length 82.5
  Top Layer w10: R12.2@-1345,77.5 cw(c-1345,61.06) -1333.37,72.69 ; R12.2 -1325.93,65.24 Q4.1 ; Q4.1@-1305.11,61.82 ccw(c-1313.38,53.55) -1313.38,65.24 ccw(c-1313.38,76.93) Q4.1@-1305.11,68.67
NetR4_1: R4.1 U5.57 | length 302.3
  Top Layer w10: v1@-948.82,479.82 ccw(c-960.44,491.44) -944,491.44 ccw(c-927.56,491.44) v1@-939.18,479.82 ; v1(-944,475) -944,522 -910.31,555.68 R4.1 ; R4.1@-820.42,552.26 ccw(c-828.69,543.99) -828.69,555.68 ccw(c-828.69,567.38) R4.1@-820.42,559.11
  Bottom Layer w10: v1(-944,475) -932.84,486.16 U5.57
NetR8_2: R8.2 U4.26 | length 117.9
  Top Layer w10: U4.26 -541.67,734.67 -534.31,727.31 ; R8.2@-537.41,720.73 ccw(c-542.88,727.31) -534.31,727.31 ; -534.75,727.75 cw(c-543.9,718.6) R8.2@-531.24,715.94 ; R8.2 -534.31,727.31 ; R8.2@-531.22,720.73 cw(c-525.75,727.31) -534.31,727.31
NetR15_2: R15.2 U6.5 | length 77.6
  Top Layer w20: R15.2@-649.31,112 v1@-607,112
  Bottom Layer w20: U6.5 v1@-608,110
  other v1: -607,111
OLED_CS: U4.13 U5.20 | length 340.6
  Top Layer w10: v1@-1003,901.19 cw(c-1003,884.75) -991.37,896.37 cw(c-979.75,908) v1@-996.19,908 ; v1(-1003,908) -979,884 -914,884 -899.94,869.94 U4.13
  Bottom Layer w10: -1011.58,921.02 ccw(c-989.98,921.02) v1@-1005.25,905.75 ; U5.20@-1011.58,945.16 ccw(c-965.84,945.16) v1@-998.18,912.82 ; U5.20 -1011.58,916.58 v1(-1003,908)
OLED_DC: U4.15 U5.26 | length 343.4
  Top Layer w10: v1(-893,914) -845,914 v1(-828,897) -844.82,880.18 U4.15 ; v1@-888.18,909.18 cw(c-876.56,897.56) -876.56,914 cw(c-876.56,930.44) v1@-888.18,918.82 ; v1@-828,890.19 ccw(c-828,873.75) -839.63,885.37 ccw(c-851.25,897) -834.81,897 ccw(c-851.25,897) -839.63,908.63 ccw(c-828,920.25) v1@-828,903.81
  Bottom Layer w10: v1@-897.82,918.82 ccw(c-908.3,929.3) -893.47,929.3 ; v1@-893.47,913.47 U5.26 ; -893.47,931.58 ccw(c-875.42,931.58) v1@-888.18,918.82
OLED_RST: U4.14 U5.27 | length 278.6
  Top Layer w10: v1@-875.82,882.18 cw(c-884.12,873.88) -872.38,873.88 ; U4.14 -872.38,885.62 v1(-871,887) ; -872.38,867.23 cw(c-851.23,867.23) v1@-866.18,882.18
  Bottom Layer w10: v1@-875.82,891.82 ccw(c-906.76,922.76) -863,922.76 ; U5.27 -873.79,935.79 -863,925 -863,895 v1(-871,887) ; U5.27@-872.9,945.86 ccw(c-855.79,942.46) -868.13,930.13 ; v1@-868.75,884.75 ccw(c-882.61,898.61) -863,898.61
OSCIN: C4.2 U5.5 XT1.3 | length 320.5
  Bottom Layer w10: C4.2@-1346.11,543.42 ccw(c-1354.38,551.69) -1342.69,551.69 ccw(c-1330.99,551.69) C4.2@-1339.26,543.42 ; XT1.3 -1302.01,638 -1237,638 -1214,661 -1214,673 -1194.9,692.1 U5.5 ; C4.2 XT1.3@-1342.69,595.09
OSCOUT: C3.2 U5.6 XT1.1 | length 371.2
  Bottom Layer w10: C3.2 -1291,733 -1269,711 XT1.1 -1241,684 ; C3.2@-1304.35,728.16 cw(c-1304.35,684.25) -1273.3,715.3 ; C3.2@-1304.35,738.16 cw(c-1304.35,718.39) -1290.37,732.37 ; -1288.86,730.86 cw(c-1322.62,697.1) XT1.1@-1275.56,689.06 ; -1275.19,717.19 cw(c-1299.27,693.11) XT1.1@-1265.7,687.37 ; XT1.1@-1254.37,676.05 cw(c-1241,668.79) -1241,684 ; XT1.1@-1254.37,691.95 ccw(c-1241,699.21) -1241,684 ; U5.6 -1213.21,711.79 -1241,684
RESET: C5.1 pad.4 U5.7 | length 218.7
  Bottom Layer w10: C5.1 -1310,821 -1220.47,731.47 U5.7 ; C5.1@-1311.35,816.16 cw(c-1311.35,801.22) -1300.78,811.78
RXD: U5.17 U7.47 | length 725.7
  Top Layer w7: U7.47 -797.36,457.64 v1@-792.99,462
  MidLayer1 w20: v1(-1097.53,981.47) -1097.53,919.53 -806,628 -806,490 v1(-785.5,469.5)
  Bottom Layer w10: v1(-1097.53,981.47) U5.17 ; v1@-1092.71,976.66 cw(c-1081.08,965.03) -1081.08,981.47 cw(c-1081.08,997.92) v1@-1092.71,986.29
RXD_NODIC: U5.16 U7.48 | length 852.5
  Top Layer w7: v1@-895,429.69 cw(c-895,409.62) -880.81,423.81 cw(c-866.62,438) v1@-886.69,438 ; v1(-895,438) -877,420 -836,420 -823.96,432.04 U7.48
  MidLayer1 w10: -917.28,496 -917.28,460.28 v1(-895,438) ; v1@-901.81,438 ccw(c-918.25,438) -906.63,449.63 ccw(c-895,461.25) v1@-895,444.81
  MidLayer1 w20: v1@-1196,921.19 cw(c-1196,895.09) -1177.54,913.54 ; v1(-1196,923) -1187,923 -917.28,653.28 -917.28,496
  Bottom Layer w10: v1(-1196,923) -1181.64,908.64 U5.16 ; -1185.12,912.12 ccw(c-1178.91,918.33) U5.16@-1178.91,909.54
SLEC_FUNCTION: R4.2 U7.44 | length 155.7
  Top Layer w7: R4.2 -783.35,516.31 -750.11,483.08 U7.44 ; R4.2@-812.52,511.83 cw(c-801.69,501) -801.69,516.31 cw(c-801.69,531.63) R4.2@-812.52,520.8
SPI_CLK: U4.18 U5.21 | length 582
  Top Layer w10: v1@-972.82,916.82 ccw(c-984.44,928.44) -968,928.44 ccw(c-951.56,928.44) v1@-963.18,916.82 ; v1(-968,912) -968,938 -953,953 -822,953 -785,916 v1(-785,889) -762.14,866.14 U4.18 ; v1@-789.82,893.82 ccw(c-801.44,905.44) -785,905.44 ccw(c-768.56,905.44) v1@-780.18,893.82 ; v1@-785,882.19 cw(c-785,865.75) -773.37,877.37 cw(c-761.75,889) v1@-778.19,889 ; -774.84,878.84 cw(c-798.55,855.13) U4.18@-765.02,855.13
  Bottom Layer w10: U5.21 -991.9,935.9 v1(-968,912) ; U5.21@-990.99,946.04 ccw(c-964.32,946.04) -983.18,927.18 ; v1@-974.81,912 ccw(c-991.25,912) -979.63,923.63 ccw(c-968,935.25) v1@-968,918.81
SPI_DIN: U4.19 U4.20 U5.23 | length 546.2
  Top Layer w10: v1(-782,714) -749,714 -734.58,728.42 U4.19 U4.20 ; v1@-777.18,709.18 cw(c-765.56,697.56) -765.56,714 cw(c-765.56,730.44) v1@-777.18,718.82
  Bottom Layer w10: U5.23 -952.53,934.53 -929,911 -929,861 v1(-782,714) ; v1@-788.81,714 ccw(c-805.25,714) -793.63,725.63 ccw(c-782,737.25) v1@-782,720.81
STM_POWERCONTROUL: R5.2 R6.2 U7.3 | length 223.6
  Top Layer w7: -870.94,368.06 U7.3
  Top Layer w10: R5.2@-923.71,316.42 ccw(c-934.31,327.03) -919.31,327.03 ; R6.2@-922.74,353.58 cw(c-931.01,345.31) -919.31,345.31 cw(c-907.62,345.31) R6.2@-915.89,353.58 ; R6.2@-920.99,360.65 cw(c-903.09,342.74) -903.09,368.06 ; R5.2 -919.31,314 R6.2 -908.25,368.06 ; R6.2@-913.92,353.58 cw(c-878.95,318.6) -878.95,368.06 ; R6.2@-912.51,357.19 cw(c-897.95,357.76) -908.25,368.06 ; -870.94,368.06 -908.25,368.06
SWCLK: P2.3 U5.49 | length 960.9
  MidLayer1 w15: v1(-746,538) -695,487 -695,284 -525,114 v1(-295,114)
  Bottom Layer w10: U5.49 -748.53,540.53 v1(-746,538) ; -768.55,540.53 cw(c-768.55,515.45) v1@-750.82,533.18
  Bottom Layer w15: v1(-295,114) -269,114 -257,102 ; -276.08,121.08 cw(c-316.95,80.2) P2.3@-259.18,78.25 ; -264.08,109.08 cw(c-281.9,91.26) P2.3@-258.37,82.21 ; P2.3@-257,74 -257,102 ; P2.3@-245.96,89.98 cw(c-244.94,102) -257,102
SWDCLK_NODIC: P3.4 U7.24 | length 256.6
  Top Layer w7: U7.24 -599.85,193.85 -528.15,193.85 -511,211 ; P3.4@-487.11,200.26 ccw(c-511,179.06) -511,211 ; P3.4@-487.11,221.74 cw(c-511,242.94) -511,211 ; P3.4@-481.87,204.9 ccw(c-495.43,192.87) -495.43,211 ccw(c-495.43,229.13) P3.4@-481.87,217.1 ; P3.4 -511,211
SWDIO: P2.2 U5.46 | length 1068.8
  MidLayer1 w15: v1(-774.27,652.73) -742.73,652.73 -615,525 -615,247.25 -520.75,153 v1(-296,153)
  Bottom Layer w10: v1(-774.27,652.73) U5.46 ; v1@-769.45,647.92 cw(c-757.82,636.29) -757.82,652.73 cw(c-757.82,669.18) v1@-769.45,657.55
  Bottom Layer w15: P2.2@-267.04,153 ccw(c-267.04,177.9) P2.2@-246.7,163.53 ; P2.2@-258.95,172.19 cw(c-296,198.35) v1(-296,153) -271,153 P2.2
SWDIO_NODIC: P3.3 U7.23 | length 378.5
  Top Layer w7: U7.23 -655.62,177.62 -648.31,170.31 -450.69,170.31 P3.3 ; U7.23@-655.2,184.9 ccw(c-643.61,182.38) -652,174 ; P3.3@-434.19,203 cw(c-473.26,203) -445.63,175.37 cw(c-418,147.74) P3.3@-418,186.82 ; P3.3@-427.18,203 cw(c-449.36,203) -433.68,187.32 cw(c-418,171.64) P3.3@-418,193.82
SWO: pad.6 U5.55 | length 581.9
  MidLayer2 w8: v1@-893.47,466.72 cw(c-893.47,457.65) -887.06,464.06 ; v1(-893.47,474.53) -893.47,470.47 -855,432 -793,432 -778.31,446.69 -558.31,446.69 -550,455 v1(-528,455) ; v1@-885.66,474.53 ccw(c-857.01,474.53) -877.27,454.27 ; v1@-533.52,449.48 ccw(c-546.86,436.14) -546.86,455 ccw(c-546.86,473.86) v1@-533.52,460.52
  Bottom Layer w8: v1(-528,455) -514,469 pad.6
  Bottom Layer w10: v1@-898.29,479.34 ccw(c-909.92,490.97) -893.47,490.97 ccw(c-877.03,490.97) v1@-888.66,479.34 ; v1(-893.47,474.53) U5.55
USB_TEST: R11.1 R14.2 U7.22 | length 843.5
  Top Layer w7: R11.1@-1111.48,436.86 cw(c-1124.73,423.62) -1106,423.62 ; R14.2@-1110.48,396.14 ccw(c-1121.31,406.97) -1106,406.97 ccw(c-1090.69,406.97) R14.2@-1101.52,396.14 ; R14.2 R11.1@-1106,442.32 ; -1106,428.45 cw(c-1094.1,428.45) R11.1@-1102.52,436.86 ; U7.22 -671.37,170.37 -649,148 v1(-645,148)
  Top Layer w10: v1(-1138,360) -1138,361 -1109.31,389.69 R14.2 ; v1@-1138,366.81 ccw(c-1138,380.84) -1128.08,370.92 ; v1@-1131.19,360 cw(c-1112.33,360) -1125.67,373.33 ; -1123.29,375.71 cw(c-1106,358.43) R14.2@-1106,382.87
  MidLayer1 w15: v1(-883,317) -814,317 -716.72,219.72 -694.72,219.72 -645,170 v1(-645,148)
  MidLayer2 w15: v1(-1138,360) -1114,336 -902,336 v1(-883,317)
VBAT: D1.1 P1.2 R10.2 U6.3 | length 341.4
  Top Layer w10: D1.1@-528.21,59.21 ccw(c-543.2,74.2) -522,74.2 ccw(c-500.8,74.2) D1.1@-515.79,59.21 ; R10.2@-524.77,104.58 cw(c-531.46,97.89) -522,97.89 ; D1.1 R10.2@-522,106.69 ; -522,94.73 cw(c-508.08,94.73) R10.2@-517.92,104.58
  Top Layer w30: D1.1@-521,54 P1.2@-454,54 ; -493.9,54 ccw(c-493.9,95.9) P1.2@-464.27,66.27 ; -484.24,54 cw(c-484.24,25.76) P1.2@-464.27,45.73
  Bottom Layer w23: U6.3 -474.8,35.2 P1.2 P1.2@-469.8,40.2
VBUS_5V: C17.2 D2.1 P4.2 R11.2 U6.4 | length 1659.7
  Top Layer w10: v1@-1161.01,425.62 ccw(c-1172.64,437.25) -1156.2,437.25 ccw(c-1139.75,437.25) v1@-1151.38,425.62 ; v1(-1156.2,420.8) -1156.2,441.8 -1115.31,482.69 R11.2 ; -1132.82,465.18 cw(c-1107,439.36) R11.2@-1107,475.87
  Top Layer w30: P4.2 v1(-1184,420.8) ; P4.2@-1237.18,420.8 cw(c-1237.18,343.82) v1@-1182.75,398.25 ; P4.2@-1230.11,403.57 cw(c-1188.51,361.97) -1188.51,420.8 cw(c-1188.51,479.64) P4.2@-1230.11,438.04 ; v1@-1188.06,396.89 cw(c-1156.2,387.62) v1(-1156.2,420.8) ; v1(-1156.2,398.2) v1(-1156.2,420.8) ; v1@-1153.2,399.29 ccw(c-1184,388) v1(-1184,420.8) ; v1(-1184,420.8) v1(-1156.2,420.8)
  MidLayer2 w40: -1184,350.84 cw(c-1108.84,350.84) v1@-1161.99,403.99 ; -1184,373.45 cw(c-1108.84,373.45) v1@-1161.99,426.59 ; v1@-1184,393 cw(c-1146.3,393) v1@-1158.94,428.52 ; v1(-1184,420.8) -1184,323 -1108,247 -1108,82 -1058,32 -747,32 -732,47 v1(-732,79)
  Bottom Layer w30: D2.1 -1184,362 v1(-1184,420.8) ; D2.1@-1205.47,326 cw(c-1170.4,326) D2.1@-1195.2,350.8
  Bottom Layer w40: C17.2 -699.73,35.2 U6.4
  other v1: -696,79 -731,105 -696,106 -1185,396
VCC33_LDO2: C2.1 Q1.2 R1.2 U1.2 | length 417.4
  Top Layer w20: v1(-949,81) -948,82 -903.69,82 R1.2
  Bottom Layer w20: U1.2@-977.26,330.26 U1.2
  Bottom Layer w30: C2.1@-979.57,150.32 cw(c-979.57,120.74) -958.65,141.65 ; U1.2@-978.52,327.35 cw(c-1006.33,299.55) -967,299.55 ; U1.2 -967,320.66 C2.1@-967,167.54 ; C2.1@-975.54,159 -975.54,158.54 -949,132 v1(-949,81) -949,58.34 Q1.2
VCC33_STM32: C8.2 C11.1 C12.2 C14.1 C15.1 C16.1 C21.2 C22.1 pad.2 Q1.3 R3.2 R9.2 U4.6 U4.9 U5.1 U5.13 U5.19 U5.32 U5.48 U5.64 | length 5675.8
  Top Layer w10: v1(-1229,28) -1197,28 -1180,45 -1180,65.31 R9.2 ; v1@-1224.18,23.18 cw(c-1212.56,11.56) -1212.56,28 cw(c-1212.56,44.44) v1@-1224.18,32.82 ; R3.2@-1202.58,491.77 ccw(c-1188.64,505.7) -1188.64,486 ; R3.2@-1201.69,486 v1(-1158,486) ; R9.2@-1182.74,62.58 cw(c-1189.35,55.96) -1180,55.96 ; -1180,52.66 cw(c-1165.97,52.66) R9.2@-1175.89,62.58 ; v1@-1162.82,481.18 ccw(c-1174.44,469.56) -1174.44,486 ccw(c-1174.44,502.44) v1@-1162.82,490.82 ; U4.6 -1092.85,732.32 C15.1 ; -1079.43,718.89 ccw(c-1051,747.32) C15.1@-1051,707.12 ; -1074.68,714.14 cw(c-1096.39,692.43) C15.1@-1065.68,692.43 ; U4.9 -1010.17,725.71 C16.1@-974.93,690.46 ; -1000.89,716.43 cw(c-1029.32,688) C16.1@-989.12,688 ; -996.14,711.68 ccw(c-974.43,733.39) C16.1@-974.43,702.69
  Top Layer w20: C15.1 C16.1@-974.93,690.46 ; C15.1@-1044.15,683.62 cw(c-1027.62,667.08) -1027.62,690.46 cw(c-1027.62,713.85) C15.1@-1044.15,697.31 ; -1003.76,690.46 cw(c-1003.76,658.67) C16.1@-981.28,681.15 ; v1@-993.28,635.28 ccw(c-1043.53,685.54) C16.1@-972.46,685.54 ; C16.1@-979.31,681.15 cw(c-995.85,664.62) -972.46,664.62 cw(c-949.08,664.62) C16.1@-965.62,681.15 ; -979.14,621.14 ccw(c-995.25,637.25) v1@-972.46,637.25 ; v1@-972.46,638.46 C16.1 ; -972.46,649.15 ccw(c-952.85,649.15) v1@-966.72,635.28
  MidLayer1 w20: -1262.68,813.68 v1(-1262.68,837.68) ; v1@-1188,1012.45 -1037,1012.45 ; v1(-1040,910) -1040,1009.45 -1037,1012.45 ; v1(-1000,461) -1000,626 v1(-992,634) ; -1000,610.31 cw(c-968.31,610.31) v1@-990.72,632.72 ; v1(-640,981) -671.44,1012.45 -1037,1012.45
  MidLayer1 w30: -1298.21,849.21 ccw(c-1262.68,884.74) v1@-1262.68,834.5 ; v1@-1265.87,837.68 ccw(c-1215.63,837.68) -1251.16,802.16 ; v1(-1229,28) -1194,28 ; v1@-1188,1012.45 -1251.55,1012.45 -1318,946 -1318,869 -1262.68,813.68 -1158,709 v1(-1158,486) -1182,486 -1227.5,440.5 -1227.5,155.5 -1194,122 -1194,28 ; v1(-788,91) -788,54 -814,28 -1194,28 ; -1193.53,474.47 cw(c-1158,438.95) -1158,489.19 ccw(c-1158,438.95) -1193.53,474.47
  MidLayer2 w20: v1(-992,634) v1(-968,634) -968,595 -943,570 -825,570 -728,473 v1(-573,473)
  MidLayer2 w30: v1(-1262.68,837.68) -1059,634 v1@-996,634
  Bottom Layer w10: C22.1 -1222.1,849.58 U5.13 ; -1143.47,605 U5.1 ; U5.64 -1070.64,469.64 -1068,467 ; v1(-1040,910) -1031.27,918.73 U5.19 ; U5.48 C14.1@-613.05,613.36 ; -627.22,613.36 cw(c-627.22,600.43) C14.1@-618.08,609.58 ; -625.47,613.36 ccw(c-625.47,623.82) C14.1@-618.08,616.42
  Bottom Layer w20: C8.2 -1247,1002 -1235,1014 v1(-1188,1014) ; v1(-1262.68,837.68) C22.1 ; v1(-1158,486) -1158,564 -1143.47,578.53 -1143.47,605 ; -1068,467 -1062.69,461.69 C12.2 ; C12.2@-1028.31,461 v1(-1000,461) ; v1@-641.28,982.28 ccw(c-671.69,1012.69) C11.1@-628.68,1012.69 ; v1(-640,981) -628.68,992.32 C11.1 ; C14.1 -612.68,512.68 v1(-573,473)
  Bottom Layer w30: Q1.3 -876,133.26 pad.2 ; -865,133.26 pad.2 ; v1(-788,91) -788,122 pad.2 ; Q1.3@-883.08,123.32 cw(c-859.09,99.33) -859.09,133.26 ccw(c-859.09,99.33) Q1.3@-883.08,123.32
VCC_NRF: C7.1 C27.2 C28.1 C32.2 P3.2 U2.2 U7.1 U7.12 U7.35 U7.36 | length 1646.4
  Top Layer w7: -864.67,226.33 U7.12
  Top Layer w8: -874.88,399.56 U7.1 ; U7.35 U7.36 C27.2 ; C27.2@-572.78,395.43 ccw(c-582.76,385.45) -582.76,399.56 ccw(c-582.76,413.66) C27.2@-572.78,403.69
  Top Layer w10: C32.2@-893.35,226.33 -864.67,226.33 ; C32.2@-891.58,215.23 cw(c-864.77,188.43) -864.77,226.33
  Top Layer w15: -944.8,410.65 cw(c-931.65,410.65) v1@-940.95,419.95 ; v1@-944.8,422.2 C28.1 -944.19,399.56 -874.88,399.56
  Top Layer w20: v1(-927,217) -926.69,216.69 C32.2@-903,216.69 ; v1(-567,423) -566.69,422.69 C27.2
  MidLayer1 w20: -962,334 -962,235 -944,217 v1(-927,217) ; -953.5,226.5 ccw(c-933.33,246.67) v1@-927.38,218.77
  MidLayer1 w30: v1(-1021,91) -1110,180 -1110,312 -1088,334 -962,334 -946,334 -944,336 v1(-944,423)
  MidLayer2 w20: v1(-944,423) -917,396 -594,396 v1(-567,423)
  Bottom Layer w30: U2.2 -1125.94,38.6 C7.1 P3.2 -1021,76 v1(-1021,91) ; -1142.31,38.6 ccw(c-1142.31,66.87) C7.1@-1122.31,46.88
pads on no net: J1.3 J2.3 U4.1 U4.7 U4.30 U5.2 U5.3 U5.4 U5.8 U5.9 U5.10 U5.11 U5.22 U5.24 U5.25 U5.29 U5.30 U5.33 U5.34 U5.35 U5.36 U5.37 U5.38 U5.39 U5.40 U5.41 U5.42 U5.43 U5.44 U5.45 U5.50 U5.52 U5.54 U5.56 U5.58 U5.59 U5.61 U5.62 U7.2 U7.4 U7.5 U7.6 U7.7 U7.9 U7.11 U7.14 U7.15 U7.16 U7.17 U7.20 U7.25 U7.27 U7.28 U7.40 U7.41 U7.42 U7.43 U7.45 U7.46

## Polygon pours and split planes (outlines as drawn)
GND on Top Layer "Top Layer-No Net" (solid, pour order 1000): -1389,1.51 -456,1.51 -456,1036.95 -1389,1036.95 -1389,1.51
GND on MidLayer1 "Top Layer-No Net" (solid, pour order 1001): -1389,1.51 -456,1.51 -456,1036.95 -1389,1036.95 -1389,1.51
GND on MidLayer2 "Top Layer-No Net" (solid, pour order 1002): -1389,1.51 -456,1.51 -456,1036.95 -1389,1036.95 -1389,1.51
GND on Bottom Layer "Top Layer-No Net" (solid): -456,1.51 -456,1036.95 -1390,1036.95 -1390,1.51

## Keep-outs
Keep-Out Layer:
  lines w5: -1389.11,111.75 -1389.11,207.15 ; -1452.49,1.51 -1452.49,92.06 -1389.11,92.06 -1389.11,938.52 -1452.49,938.52 -1452.49,1036.95 -212.36,1036.95 -212.36,1.51 -1452.49,1.51

## Other copper
Top Layer:
  rectangle net VCC_NRF: -607.39,381 -556,399.56
  rectangle net NetC1_1: -1210,163 -1143,224
  rectangle net NetB1_5: -444.49,295.95 -222.49,354.95
  region net NetB1_5: -281.49,494.95 -281.49,295.95 -222.49,295.95 -222.49,494.95
  rectangle net NetB1_5: -395.49,435.95 -222.49,494.95
  region net NetB1_5: -395.49,660.95 -395.49,435.95 -336.49,435.95 -336.49,660.95
  rectangle net NetB1_5: -395.49,601.95 -222.49,660.95
  region net NetB1_5: -222.49,601.95 -222.49,993.95 -281.49,993.95 -281.49,601.95
  rectangle net VBUS_5V: -1200,383 -1147,436
MidLayer2:
  rectangle net VBUS_5V: -1202,385 -1142,438
  rectangle net VBUS_5V: -750,62 -681,120
Bottom Layer:
  rectangle net GND: -508.33,93.59 -456,184.98
  rectangle net NetC1_1: -1209,163 -1144,249.2
  rectangle net VCC33_STM32: -780,1006 -638,1024
  rectangle net VBUS_5V: -1198,382 -1142,435
  rectangle net VBUS_5V: -724,51 -683,119
  rectangle net VBUS_5V: -744,70 -702,119

## Silkscreen, mask and mechanical layers (free items; w line width, h text height)
Top Overlay:
  lines w5: -1389.11,938.52 -1389.11,1036.95 ; -831.04,592.54 -831.04,1036.95 ; -276.91,1.51 -276.91,1036.95 ; -1416.67,235.76 -1389.11,235.76 -1389.11,192.46 -1271,192.46 -1271,349.94 -1389.11,349.94 -1389.11,306.63 -1416.67,306.63 -1416.67,235.76 ; -1416.67,731.83 -1389.11,731.83 -1389.11,688.52 -1271,688.52 -1271,846 -1389.11,846 -1389.11,802.69 -1416.67,802.69 -1416.67,731.83
  text "BitPie_v3.0" at -969,980 h25
  text "Nsck" at -336,194 h25 r90
  text "Nsdio" at -294,176 h25 r90
  text "+" at -504,79 h25 r270
  text "+" at -538,10 h25 r270
Bottom Overlay:
  lines w5: -1389.11,235.76 -1416.67,235.76 -1416.67,306.63 -1389.11,306.63 ; -1389.11,731.83 -1416.67,731.83 -1416.67,802.69 -1389.11,802.69 ; -271.42,1.51 -271.42,1036.95
  text "swo" at -394,477 h25
  text "StDio" at -293,303 h25
  text "Stclk" at -300,249 h25
  text "vccS" at -803,172 h25 r270
  text "vccN" at -948.12,12.22 h23
Top Solder:
  rectangle: -444.49,295.95 -222.49,354.95
  region: -222.49,601.95 -222.49,993.95 -281.49,993.95 -281.49,601.95
  rectangle: -395.49,601.95 -222.49,660.95
  region: -395.49,660.95 -395.49,435.95 -336.49,435.95 -336.49,660.95
  rectangle: -395.49,435.95 -222.49,494.95
  region: -281.49,494.95 -281.49,295.95 -222.49,295.95 -222.49,494.95